# Altium PCB Driver_3.PcbDoc
Units mil, origin at the board's own origin, x right, y up, seen from the top; angles counter-clockwise.
Board outline 3937.01 x 3937.01 mil, 2 copper layers (Top Layer, Bottom Layer); 124 components, 77 nets, 373 pads, 361 vias.
Unrouted connection lines stored in the file: 72.
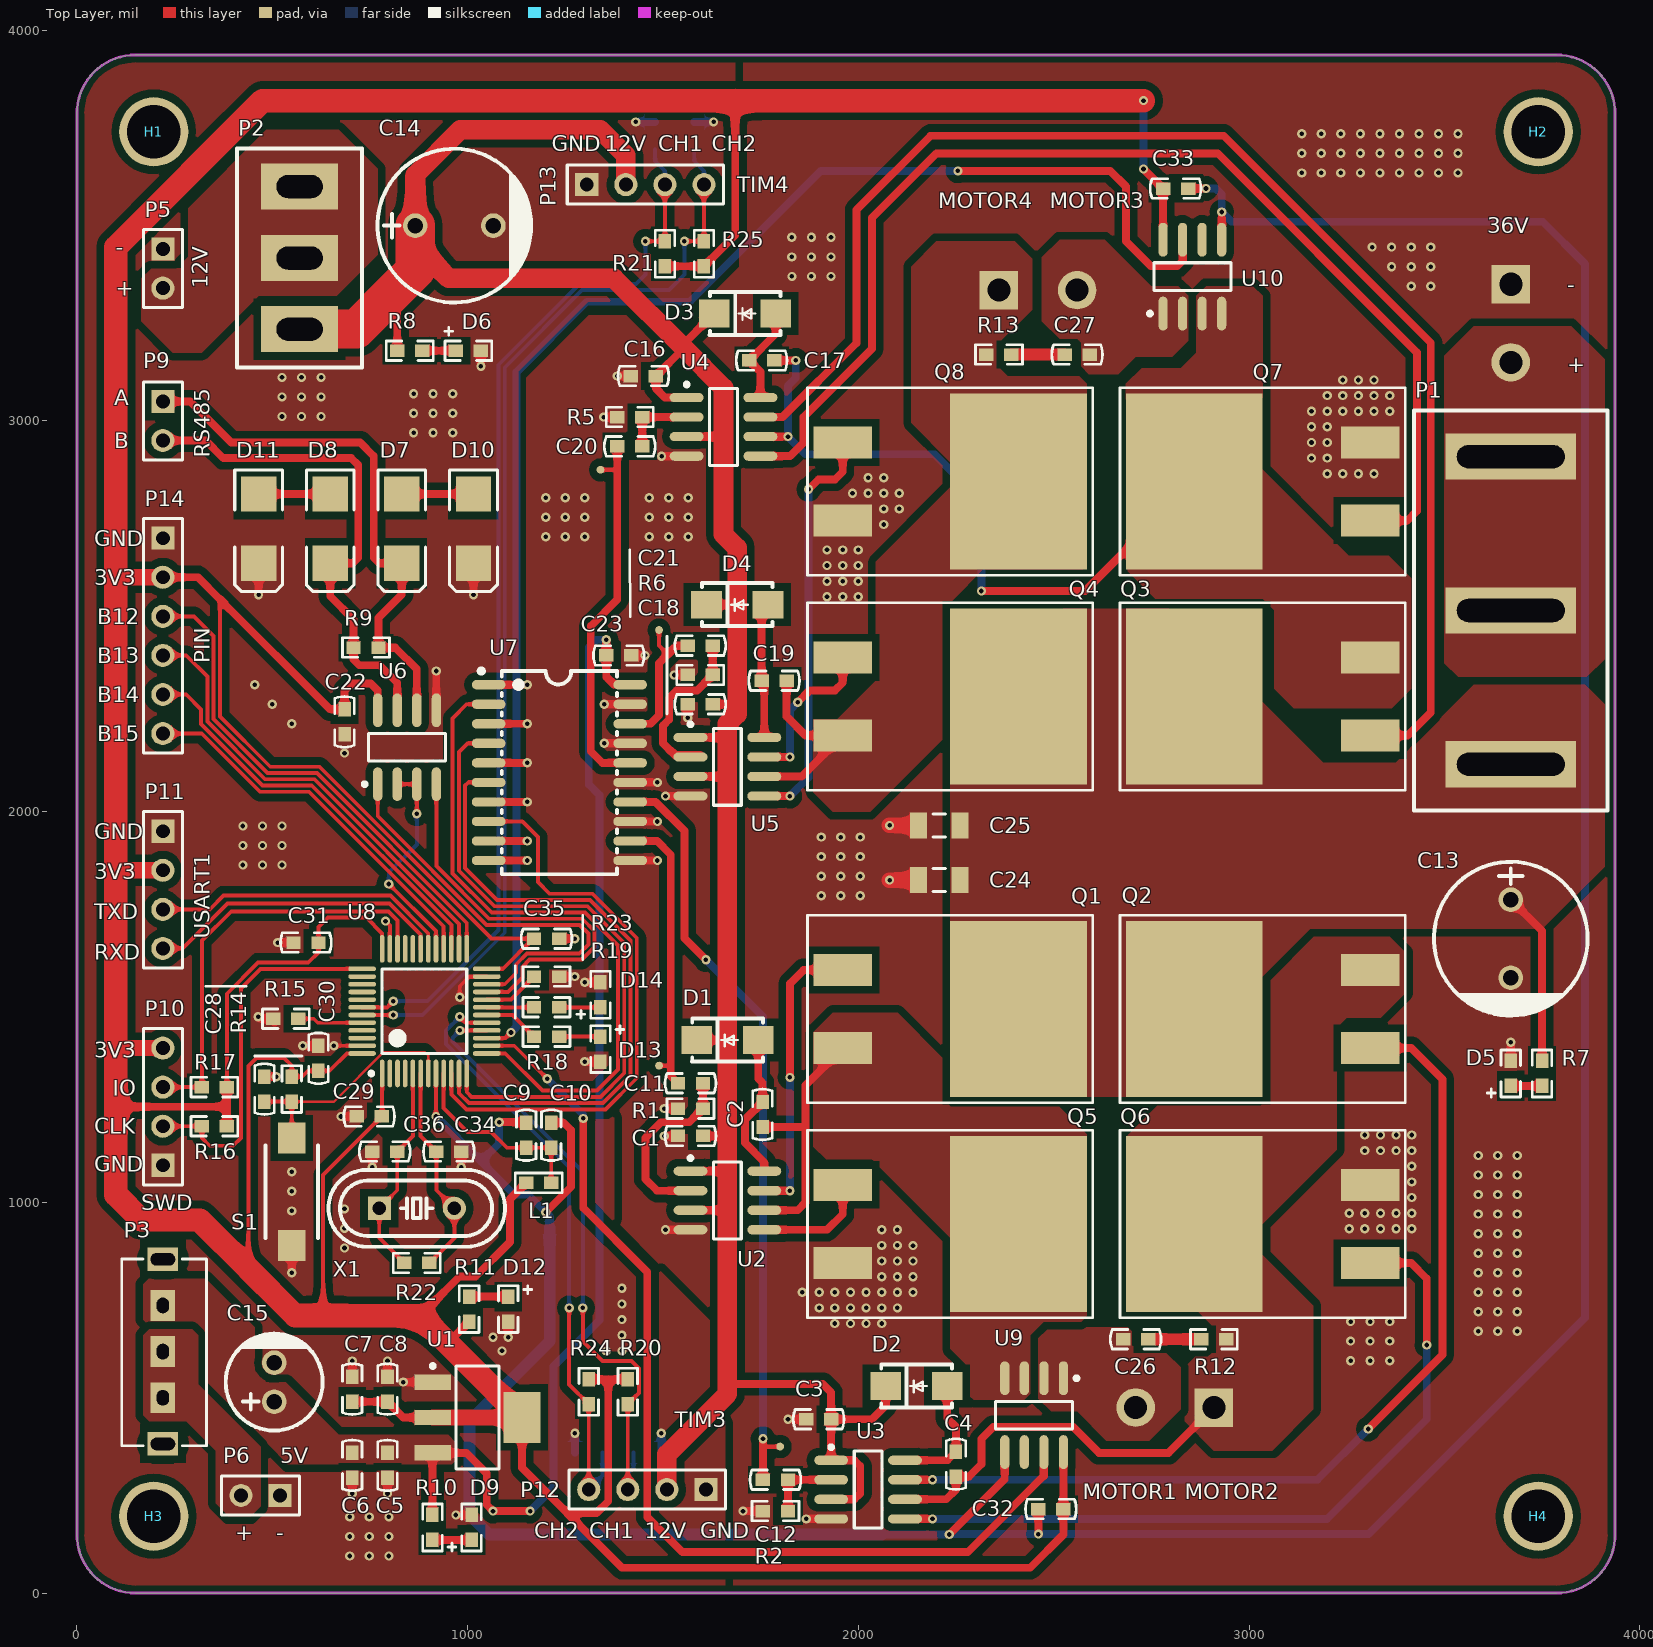
[diagram p0: Top Layer view]
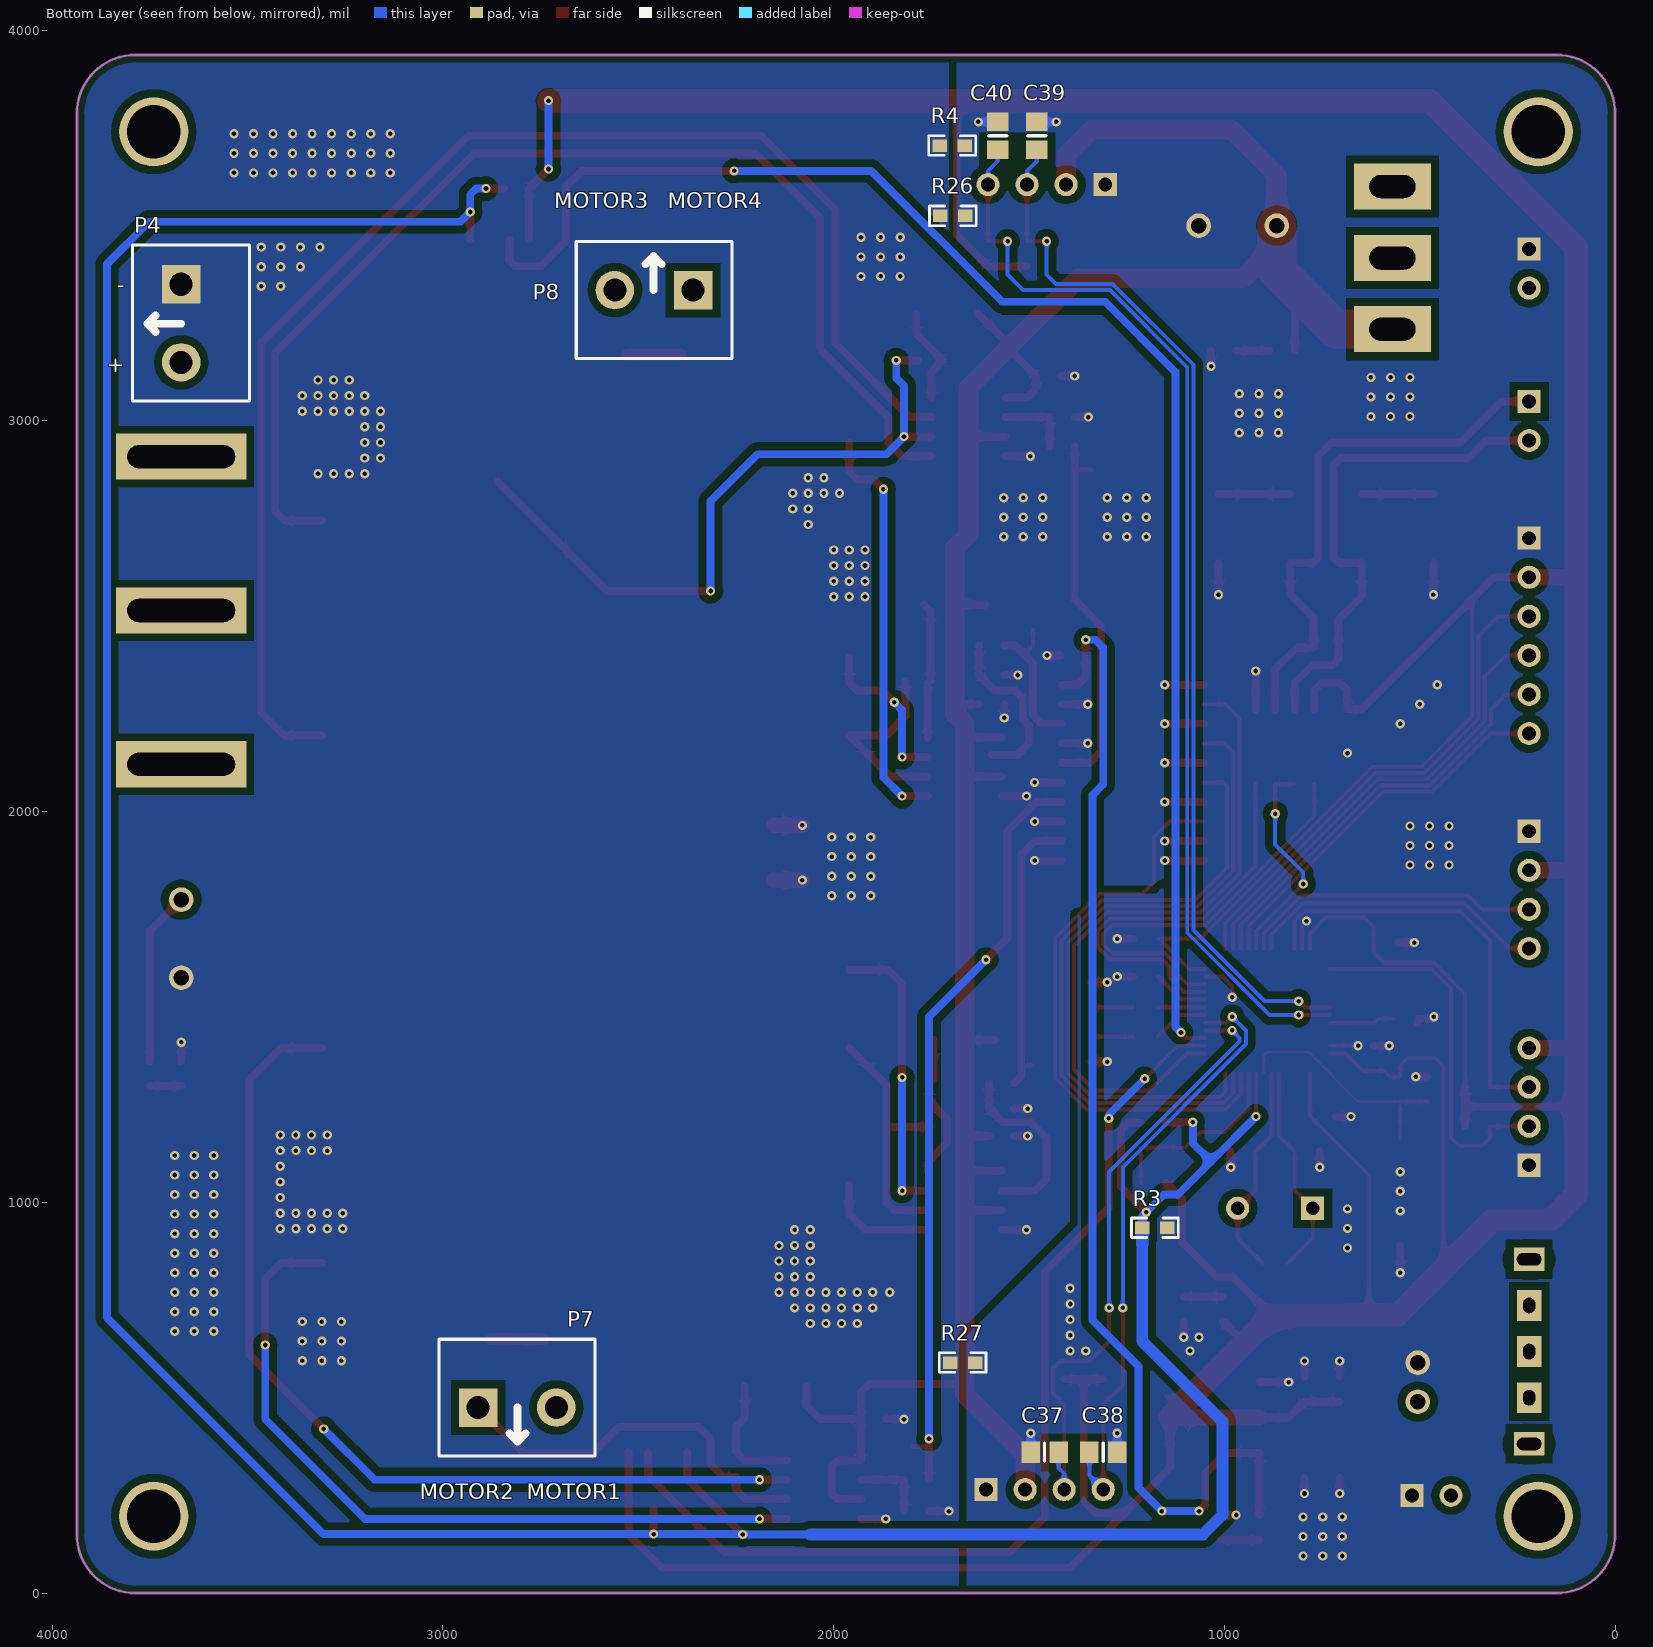
[diagram p1: Bottom Layer view, seen from below]

## Layer stack, top to bottom
Top Solder: solder mask 0.4, Solder Resist, Dk 3.5
Top Layer: signal copper 1.4
Dielectric 1: dielectric 12.6, FR-4, Dk 4.8
Bottom Layer: signal copper 1.4
Bottom Solder: solder mask 0.4, Solder Resist, Dk 3.5

## Board outline
0,150 0,3787.01 cw(c150,3787.01) 150,3937.01 3787.01,3937.01 cw(c3787.01,3787.01) 3937.01,3787.01 3937.01,150 cw(c3787.01,150) 3787.01,0 150,0 cw(c150,150)

## Design rules (kind name [scope] priority, off if disabled: settings)
Clearance Clearance_2 [InPolygon vs OnLayer('Keep-Out Layer')] p1: gap=15.75 ignorepadtopadclearanceinfootprint=FALSE
Clearance Clearance_1 [All vs InPolygon] p2: gap=20 ignorepadtopadclearanceinfootprint=FALSE
Clearance [All] p3: gap=6 ignorepadtopadclearanceinfootprint=FALSE
HoleSize [All] p1: absolutevalues=TRUE maxlimit=500 minlimit=1 maxpercent=80.000 minpercent=20.000
PlaneConnect PlaneConnect_1 [InNet('DGND')] p1: planeconnectstyle=Relief reliefexpansion=20 reliefentries=4 reliefconductorwidth=10 reliefairgap=10
PlaneConnect [All] p2: planeconnectstyle=Direct reliefexpansion=20 reliefentries=4 reliefconductorwidth=10 reliefairgap=10
PolygonConnect [All] p1: connectstyle=Direct reliefconductorwidth=10 reliefentries=4 polygonreliefangle="90 Angle" airgapwidth=10
RoutingVias [All] p1: holewidth=28 width=50 viastyle="Through Hole" minholewidth=28 minwidth=50 maxholewidth=28 maxwidth=50
SilkToSilkClearance [All] p1: silktosilkclearance=6
SilkToSolderMaskClearance [IsPad] p1: minsilkscreentomaskgap=3 clearancetoexposedcopper=TRUE
SolderMaskExpansion [All] p1: expansion=4
Width [All] p1: maxlimit=400 minlimit=6 preferedwidth=10 minimp=50.000000 maximp=50.000000 favimp=50.000000
26 further rules are at their usual default settings.

## Classes and differential pairs
component class Driver: C1 C2 C3 C4 C5 C6 C7 C8 C9 C10 C11 C12 C13 C14 C15 C16 C17 C18 C19 C20 C21 C22 C23 C24 C25 C26 C27 C28 C29 C30 C31 C32 C33 C34 C35 C36 C37 C38 C39 C40 D1 D2 D3 D4 D5 D6 D7 D8 D9 D10 D11 D12 D13 D14 H1 H2 H3 H4 L1 P1 P2 P3 P4 P5 P6 P7 P8 P9 P10 P11 P13 P14 Q1 Q2 Q3 Q4 Q5 Q6 Q7 Q8 R1 R2 R3 R4 R5 R6 R7 R8 R9 R10 R11 R12 R13 R14 R16 R17 R18 R19 R20 R21 R22 R23 R24 R25 S1 U1 U2 U3 U4 U5 U6 U7 U8 U9 U10 X1

## Components (designator, comment, footprint, x,y, rotation, side; value= is the part's Value field where it differs from the comment)
C1 "0.1μF" 0603C 1570.51,1170 r0 top
C2 "1μF" 0603C 1755,1225 r270 top
C3 "0.1μF" 0603C 1898.51,445 r0 top
C4 "1μF" 0603C 2250,330 r270 top
C5 "10μF" 0603C 795,326.94 r90 top
C6 "0.1μF" 0603C 705,326.94 r90 top
C7 "10μF" 0603C 705,522 r270 top
C8 "0.1μF" 0603C 795,522 r270 top
C9 "0.1μF" 0603C 1150,1172 r270 top
C10 "1μF" 0603C 1214,1172 r270 top
C11 "0.1μF" 0603C 1570.51,1305 r0 top
C12 "0.1μF" 0603C 1788,290 r0 top
C13 "220μF 50V" CAP-TH_BD10.0-P5.00-D1.0-FD 3670,1675 r270 top
C14 "220μF 50V" CAP-TH_BD10.0-P5.00-D1.0-FD 966,3500 r0 top locked
C15 "220μF 16V" CAP-TH_BD6.3-P2.50-D1.0-FD 505,540 r90 top locked
C16 "0.1μF" 0603C 1450,3115 r0 top
C17 "1μF" 0603C 1752.49,3155 r0 top
C18 "0.1μF" 0603C 1595.51,2275 r0 top
C19 "1μF" 0603C 1784.49,2335 r0 top
C20 "0.1μF" 0603C 1415,2935 r0 top
C21 "0.1μF" 0603C 1595.51,2425 r0 top
C22 "0.1μF" 0603C 685,2230 r270 top
C23 "100nF" 0603C 1387,2400 r0 top
C24 "1μF" C1206 2206.85,1825 r0 top
C25 "1μF" C1206 2206.85,1965 r0 top
C26 "0.1μF" 0603C 2710,650 r180 top
C27 "0.1μF" 0603C 2560,3170 r0 top
C28 "0.1μF" 0603C 480,1289.87 r270 top
C29 "0.1μF" 0603C 748,1220 r0 top
C30 "0.1μF" 0603C 618.36,1368.87 r270 top
C31 "0.1μF" 0603C 586.36,1665 r0 top
C32 "0.1μF" 0603C 2493,215 r0 top
C33 "0.1μF" 0603C 2812,3595 r180 top
C34 "20pF" 0603C 952,1130 r0 top
C35 "0.1μF" 0603C 1202,1675 r180 top
C36 "20pF" 0603C 788,1130 r180 top
C37 "1nF" 6-0805_N 1460,360 r180 bottom
C38 "1nF" 6-0805_N 1310,360 r0 bottom
C39 "1nF" 6-0805_N 1480,3730 r270 bottom
C40 "1nF" 6-0805_N 1580,3730 r270 bottom
D1 "D-SS12" SMA_L4.4-W2.6-LS5.0-RD 1665,1415.55 r0 top
D2 "D-SS12" SMA_L4.4-W2.6-LS5.0-RD 2148.74,530 r0 top
D3 "D-SS12" SMA_L4.4-W2.6-LS5.0-RD 1710,3275 r0 top
D4 "D-SS12" SMA_L4.4-W2.6-LS5.0-RD 1690,2530 r0 top
D5 "LED_0603" 0603D 3670,1330 r90 top
D6 "LED_0603" 0603D 1002,3180 r0 top
D7 "P6KE11A" SMB 831.67,2724.5 r270 top
D8 "P6KE11A" SMB 648.33,2724.5 r270 top
D9 "LED_0603" 0603D 1010,168 r90 top
D10 "P6KE6.8A" SMB 1015,2724.5 r270 top
D11 "P6KE6.8A" SMB 465,2724.5 r270 top
D12 "LED_0603" 0603D 1103.92,727 r270 top
D13 "LED_0603" 0603D 1340,1392.29 r270 top
D14 "LED_0603" 0603D 1340,1531.29 r90 top
H1 "安装孔" 安装孔#1 260,3740.16 r0 top
H2 "安装孔" 安装孔#2 3730,3705 r0 top
H3 "安装孔" 安装孔#3 92.58,92.58 r0 top
H4 "安装孔" 安装孔#4 3740.16,92.58 r0 top
L1 "Inductor" 0603L 1182,1050 r0 top
P1 "SWITCH36" 船型开关 3670,2515 r180 top
P2 "SWITCH12" 钮子开关 570,3417 r180 top
P3 "SWITCH5" SWITCH_SS-12F44 220,500 r90 top
P4 "PWR36" KF301 3670,3250 r270 bottom
P5 "PWR12" HDR1X2 220,3440 r270 top locked
P6 "PWR5" HDR1X2 520,250 r180 top locked
P7 "MOTOR" KF301 2810,475 r180 bottom
P8 "MOTOR" KF301 2460,3335 r0 bottom
P9 "RS485" HDR1X2 220,3050 r270 top
P10 "Header 4" HDR1X4 220,1095 r90 top locked
P11 "UART" HDR1X4 220,1950 r270 top locked
P12 "CODER" HDR1X4 1610,265 r180 top locked
P13 "CODER" HDR1X4 1305,3605 r0 top locked
P14 "GPIO" HDR1X6 220,2700 r270 top locked
Q1 "IRF3205" IRF3205_D2PAK 2585,1495 r270 top
Q2 "IRF3205" IRF3205_D2PAK 2685,1495 r90 top
Q3 "IRF3205" IRF3205_D2PAK 2685,2295 r90 top
Q4 "IRF3205" IRF3205_D2PAK 2585,2295 r270 top
Q5 "IRF3205" IRF3205_D2PAK 2585,945 r270 top
Q6 "IRF3205" IRF3205_D2PAK 2685,945 r90 top
Q7 "IRF3205" IRF3205_D2PAK 2685,2845 r90 top
Q8 "IRF3205" IRF3205_D2PAK 2585,2845 r270 top
R1 "10K" 0603R 1570.51,1240 r0 top
R2 "10K" 0603R 1788,210 r0 top
R3 "0Ω" 0603R 1178,935 r180 bottom value=10K
R4 "0Ω" 0603R 1696.5,3705 r180 bottom value=10K
R5 "10K" 0603R 1415,3010 r0 top
R6 "10K" 0603R 1595.51,2350 r0 top
R7 "10K" 0603R 3750,1330 r90 top
R8 "10K" 0603R 852,3180 r180 top
R9 "120" 0603R 740,2420 r180 top value=10K
R10 "10K" 0603R 910,168 r90 top
R11 "10K" 0603R 1003.92,727 r270 top
R12 "100R" 0603R 2910,650 r0 top value=10K
R13 "100R" 0603R 2360,3170 r180 top value=10K
R14 "10K" 0603R 550,1289.87 r270 top
R15 "10K" 0603R 535,1470 r0 top
R16 "10K" 0603R 352,1195 r180 top
R17 "10K" 0603R 352,1295 r180 top
R18 "10K" 0603R 1202,1424.29 r180 top
R19 "10K" 0603R 1202,1499.29 r180 top
R20 "10K" 0603R 1410,515.49 r90 top
R21 "10K" 0603R 1505,3428 r270 top
R22 "1M" 0603R 870,845 r180 top value=10K
R23 "10K" 0603R 1202,1578.03 r0 top
R24 "10K" 0603R 1310,515.49 r90 top
R25 "10K" 0603R 1605,3428 r270 top
R26 "Comment" 0603R 1695,3525 r180 bottom
R27 "Comment" 0603R 1670,590 r0 bottom
S1 "SW_PB" SMD_6MM*3MM 550,1027.2 r270 top
U1 "AS1117-3.3" SOT223_N 1025,449.49 r0 top
U2 "IR2104S" SO8_N 1665,1005 r0 top
U3 "IR2104S" SO8_N 2025,265 r0 top
U4 "IR2104S" SO8_N 1655,2985 r0 top
U5 "IR2104S" SO8_N 1665,2115 r0 top
U6 "MAX3485" SO8_N 845,2165 r90 top
U7 "74HC244" SOIC-20_L13.3-W7.5-P1.27-LS7.8-BL 1235,2100 r270 top
U8 "stm32f103c8t6" STM-LQFP48_N 889.53,1489.45 r90 top
U9 "CC6904SO" SO8_N 2450,455.51 r270 top
U10 "CC6904SO" SO8_N 2855,3369.49 r90 top
X1 "8MHz" HC-49US_L11.5-W4.5-P4.88 870,985 r0 top
? "Comment" TEST-POINT#1 1490,2465 r0 top
? "Comment" TEST-POINT#2 1340,2875 r0 top
? "Comment" TEST-POINT#3 1800,375 r0 top
? "Comment" TEST-POINT#4 1490,1350 r0 top

## Footprints (in the part's own frame and the unit in brackets; to place one, negate y for a bottom-side part, rotate by r counter-clockwise, add the part's x,y. Pads: shape width x height; smd on the part's side, far side on the other; paste and mask are expansions set on the pad)
6-0805_N [mm] "Chip Resistor, Body 2.0x1.2mm, IPC Medium Density"
  rect 1.2x1.4 smd: 1(-0.9,0) 2(0.9,0)
  silkscreen extent 0,-0.6 0,0.6, body extent -1.07,-0.7 1.07,0.7, height 0.7
0603C [mil]
  rect 37x32 smd: 1(-32,0) 2(32,0)
  silkscreen extent -65,-25 65,25, body extent -31,-16 32,16, height 12
0603D [mil]
  rect 37x32 smd: 1(-32,0) 2(32,0)
  silkscreen extent -60,-25 60,60, body extent -31,-16 32,16, height 12
0603L [mil]
  rect 37x32 smd: 1(-32,0) 2(32,0)
  silkscreen extent -60,-25 60,25, body extent -31,-16 32,16, height 12
0603R [mil]
  rect 37x32 smd: 1(-32,0) 2(32,0)
  silkscreen extent -60,-25 60,25, body extent -31,-16 32,16, height 12
C1206 [mm] "Chip Capacitor, Body 3.2x1.6mm, IPC High Density"
  rect 1.1x1.7 smd: 1(-1.35,0) 2(1.35,0)
  silkscreen extent -0.4,-0.75 0.4,0.75, body extent -1.7,-0.9 1.7,0.9, height 1.3
CAP-TH_BD6.3-P2.50-D1.0-FD [mm]
  round 1.6 hole 1: 1(-1.27,0) 2(1.27,0)
  silkscreen extent -3.15,-3.15 3.17,3.15
CAP-TH_BD10.0-P5.00-D1.0-FD [mm]
  round 1.6 hole 1: 1(-2.54,0) 2(2.54,0)
  silkscreen extent -5,-4.99 5.08,5
HC-49US_L11.5-W4.5-P4.88 [mm]
  rect 1.5x1.5 hole 0.9: 1(-2.438,0)
  round 1.5 hole 0.9: 2(2.438,0)
  silkscreen extent -5.74,-2.5 5.74,2.5
HDR1X2 [mm] "Connector; Header; 2 Position"
  rect 1.5x1.5 hole 0.9: 1(0,0)
  round 1.5 hole 0.9: 2(2.54,0)
  silkscreen extent -1.27,-1.27 3.81,1.27
HDR1X4 [mm] "Connector; Header; 4 Position"
  rect 1.5x1.5 hole 0.9: 1(0,0)
  round 1.5 hole 0.9: 2(2.54,0) 3(5.08,0) 4(7.62,0)
  silkscreen extent -1.27,-1.27 8.89,1.27
HDR1X6 [mm] "Connector; Header; 6 Position"
  rect 1.5x1.5 hole 0.9: 1(0,0)
  round 1.5 hole 0.9: 2(2.54,0) 3(5.08,0) 4(7.62,0) 5(10.16,0) 6(12.7,0)
  silkscreen extent -1.27,-1.27 13.97,1.27
IRF3205_D2PAK [mil]
  rect 82x150 smd: 1(-100,-625) 3(100,-625)
  rect 450x350 smd: 2(0,-175)
  silkscreen extent -240,-715 240,15
KF301 [mm]
  rect 2.5x2.5 hole 1.5: 1(-2.54,0)
  round 2.5 hole 1.5: 2(2.54,0)
  silkscreen extent -5.08,-3.16 5.05,4.44, body extent -4.97,-3.05 5.03,4.35, height 10.18
SMA_L4.4-W2.6-LS5.0-RD [mm]
  rect 2x1.8 smd: 1(-2,0) 2(2,0)
  silkscreen extent -2.3,-1.4 2.3,1.4
SMB [mm] "DO-214-AA/SMB; 2 C-Bend Leads; Body 5.3 x 3.6 mm, inc. leads (LxW)"
  rect 2.3x2.3 smd: 1(-2.25,0) 2(2.25,0)
  silkscreen extent -3.8,-1.55 4.1,1.55
SMD_6MM*3MM [mm]
  rect 2x1.8 smd: 1(-3.5,0) 2(3.5,0)
  silkscreen extent -3,-1.7 3,1.7
SO8_N [mm] "SOIC, 8-Leads, Body 4.9x3.9mm, Pitch 1.27mm, IPC Medium Density"
  oval 2.2x0.6 smd: 1(-2.4,1.905) 2(-2.4,0.635) 3(-2.4,-0.635) 4(-2.4,-1.905) 5(2.4,-1.905) 6(2.4,-0.635) 7(2.4,0.635) 8(2.4,1.905)
  silkscreen extent -2.52,-2.5 0.9,2.88, body extent -2,-2.5 2,2.5, height 1.75
SOIC-20_L13.3-W7.5-P1.27-LS7.8-BL [mm]
  oval 0.6x2.198 smd: 1(-5.715,-4.6) 2(-4.445,-4.6) 3(-3.175,-4.6) 4(-1.905,-4.6) 5(-0.635,-4.6) 6(0.635,-4.6) 7(1.905,-4.6) 8(3.175,-4.6) 9(4.445,-4.6) 10(5.715,-4.6) 11(5.715,4.6) 12(4.445,4.6) 13(3.175,4.6) 14(1.905,4.6) 15(0.635,4.6) 16(-0.635,4.6) 17(-1.905,4.6) 18(-3.175,4.6) 19(-4.445,4.6) 20(-5.715,4.6)
  silkscreen extent -6.75,-5.23 6.6,3.75
SOT223_N [mm] "SOT223, 4-Leads, Body 6.5x3.5mm, Pitch 2.3mm, Lead Span 7mm, IPC Medium Density"
  rect 2.4x1 smd: 1(-2.9,2.3) 2(-2.9,0) 3(-2.9,-2.3)
  rect 2.4x3.3 smd: 4(2.9,0)
  silkscreen extent -3.02,-3.35 1.4,3.47, body extent -1.85,-3.35 1.85,3.35, height 1.7
STM-LQFP48_N [mm] "QFP, 48-Leads, Body 7x7mm, Pitch 0.5mm, IPC Medium Density"
  oval 1.8x0.3 smd: 1(-4.05,2.75) 2(-4.05,2.25) 3(-4.05,1.75) 4(-4.05,1.25) 5(-4.05,0.75) 6(-4.05,0.25) 7(-4.05,-0.25) 8(-4.05,-0.75) 9(-4.05,-1.25) 10(-4.05,-1.75) 11(-4.05,-2.25) 12(-4.05,-2.75) 25(4.05,-2.75) 26(4.05,-2.25) 27(4.05,-1.75) 28(4.05,-1.25) 29(4.05,-0.75) 30(4.05,-0.25) 31(4.05,0.25) 32(4.05,0.75) 33(4.05,1.25) 34(4.05,1.75) 35(4.05,2.25) 36(4.05,2.75)
  oval 0.3x1.8 smd: 13(-2.75,-4.05) 14(-2.25,-4.05) 15(-1.75,-4.05) 16(-1.25,-4.05) 17(-0.75,-4.05) 18(-0.25,-4.05) 19(0.25,-4.05) 20(0.75,-4.05) 21(1.25,-4.05) 22(1.75,-4.05) 23(2.25,-4.05) 24(2.75,-4.05) 37(2.75,4.05) 38(2.25,4.05) 39(1.75,4.05) 40(1.25,4.05) 41(0.75,4.05) 42(0.25,4.05) 43(-0.25,4.05) 44(-0.75,4.05) 45(-1.25,4.05) 46(-1.75,4.05) 47(-2.25,4.05) 48(-2.75,4.05)
  silkscreen extent -4.17,-2.75 2.75,3.57, body extent -3.5,-3.5 3.5,3.5, height 1.6
SWITCH_SS-12F44 [mm]
  rect 2x1.6 hole 0.8 slot 1 at 0 deg: 1(0,0) 2(3,0) 3(6,0)
  rect 1.524x2 hole 1.6 slot 0.8 at 0 deg: 4(-3,0) 5(9,0)
  silkscreen extent -3.12,-2.83 9.02,2.67
TEST-POINT#1 [mil]
  round 20 smd: T4(0,0)
TEST-POINT#2 [mil]
  round 20 smd: T3(0,0)
TEST-POINT#3 [mil]
  round 20 smd: T2(0,0)
TEST-POINT#4 [mil]
  round 20 smd: T1(0,0)
安装孔#1 [mm]
  round 4.5 hole 3.5: 1(-1.604,0)
安装孔#2 [mm]
  round 4.5 hole 3.5: 1(0.258,0.893)
安装孔#3 [mm]
  round 4.5 hole 3.5: 1(2.648,2.648)
安装孔#4 [mm]
  round 4.5 hole 3.5: 1(0,2.648)
船型开关 [mm]
  rect 8.5x3 hole 1.5 slot 7 at 0 deg: 1(0,-10) 2(0,0) 3(0,10)
  silkscreen extent -6.3,-13 6.3,13
钮子开关 [mm]
  rect 5x3 hole 1.5 slot 3 at 0 deg: 1(0,-4.648) 2(0,0) 3(0,4.623)
  silkscreen extent -4.06,-7.11 4.06,7.11

## Part data
C1 C2 C3 C4 C5 C6 C7 C8 C9 C10 C11 C12 C16 C17 C18 C19 C20 C21 C22 C23 C24 C25 C26 C27 C28 C29 C30 C31 C32 C33 C34 C35 C36 C37 C38 C39 C40: library part Cap, "Capacitor", LatestRevisionDate=17-Jul-2002, LatestRevisionNote="Re-released for DXP Platform.", PackageDescription="Radial Cap, Thru-Hole; 2 Leads; 0.3 in Pin Spacing", PackageReference=RAD-0.3, Published=8-Jun-2000, Publisher="Altium Limited"
C13 C14 C15: library part Cap_A, "Capacitor"
D7 D8 D10 D11: library part P6KE68A, BOM_Manufacturer=RUILON, BOM_Manufacturer Part=P6KE68A, BOM_Supplier=LCSC, BOM_Supplier Part=C10195, spicePre=D, spiceSymbolName=P6KE68A
P1 P2 P3: library part "Header 3", "Header, 3-Pin", LatestRevisionDate=17-Jul-2002, LatestRevisionNote="Re-released for DXP Platform.", Publisher="Altium Limited"
P4 P5 P6 P7 P8 P9: library part "Header 2", "Header, 2-Pin", LatestRevisionDate=17-Jul-2002, LatestRevisionNote="Re-released for DXP Platform.", Publisher="Altium Limited"
P10: "Header, 4-Pin", LatestRevisionDate=17-Jul-2002, LatestRevisionNote="Re-released for DXP Platform.", Publisher="Altium Limited"
P11 P12 P13: library part "Header 4", "Header, 4-Pin", LatestRevisionDate=17-Jul-2002, LatestRevisionNote="Re-released for DXP Platform.", Publisher="Altium Limited"
P14: library part "Header 6", "Header, 6-Pin", LatestRevisionDate=17-Jul-2002, LatestRevisionNote="Re-released for DXP Platform.", Publisher="Altium Limited"
R1 R2 R3 R4 R5 R6 R7 R8 R9 R10 R11 R12 R13 R14 R15 R16 R17 R18 R19 R20 R21 R22 R23 R24 R25: library part Res1, "Resistor", LatestRevisionDate=17-Jul-2002, LatestRevisionNote="Re-released for DXP Platform.", PackageDescription="Axial Device, Thru-Hole; 2 Leads; 0.3 in Pin Spacing", PackageReference=AXIAL-0.3, Published=8-Jun-2000, Publisher="Altium Limited"
S1: "SWITCH"
U9 U10: library part CC6902SO
X1: "Crystal", BOM_Manufacturer="ZheJiang East Crystal Elec", BOM_Manufacturer Part=B08000J065, BOM_Supplier=LCSC, BOM_Supplier Part=C258976, Contributor=LCSC, nameAlias=Frequency, spicePre=X, spiceSymbolName=B08000J065
Q1 Q2 Q3 Q4 Q5 Q6 Q7 Q8: Code_JEDEC=TO-220-AB, DatasheetDocument=PD-9.814, LatestRevisionDate=17-Jul-2002, LatestRevisionNote="Re-released for DXP Platform.", Note="Pin 2 is electrically connected to pin 4.", PackageReference=TO-220AB, Published=8-Jun-2000, Publisher="Altium Limited"

## Via types
v1: diameter 23.62, hole 11.81, Top Layer to Bottom Layer, tented both sides, 361 vias

## Nets (pads, with @x,y where several pads share a name; then routed paths per layer and width w, separated by ;. In a path a pad name is that pad's centre, name@x,y a point inside that pad or via, vN(x,y) a via of type N, cw(c..) or ccw(c..) an arc to the next point about the centre after c; other vN are vias at no path point)
485DIR: U6.2 U6.3 U8.29 | length 551.4
  Top Layer w10: v1(798.21,1815) 919.06,1694.15 U8.29 ; U6.2 U6.3 v1(870,1995)
  Bottom Layer w10: v1(798.21,1815) 798.21,1844.15 870,1915.94 v1(870,1995)
ADC12_IN4: U8.14 U9.7 | length 2611.5
  Top Layer w10: U8.14 1119.44,1400.87 v1(1204.05,1316.26)
  Top Layer w20: v1(1296,1215) 1296,986 1460,822 1460,195 1550,105 2280,105 2475,300 U9.7
  Bottom Layer w20: v1(1204.05,1316.26) 1296,1224.3 v1(1296,1215)
ADC12_IN5: U8.15 U10.7 | length 3924.9
  Top Layer w10: U8.15 1096.5,1420.55 v1(1110.94,1435)
  Top Layer w20: v1(2255,3640) 2645,3640 2685,3600 2685,3460 2749,3396 2816,3396 2830,3410 U10.7
  Bottom Layer w20: v1(1110.94,1435) 1125,1449.06 1125,3125 1305,3305 1569,3305 1904,3640 v1(2255,3640)
AGND: C9.1 C10.1 C32.1 C33.1 R3.1 U8.8 U9.5 U10.5 | length 9171.6
  Top Layer w10: v1(919.06,1220) U8.8
  Top Layer w20: v1(1080.76,1205.39) 1148.61,1205.39 C9.1 ; v1(1200,975) 1265,1040 1265,1185 1246,1204 C10.1 ; v1(2233,150) 2375,292 U9.5 ; v1(2461,151) C32.1 ; C33.1 v1(2890,3595) ; U10.5 v1(2930,3535)
  Bottom Layer w20: v1(919.06,1220) 1034.06,1105 ; v1(1080.76,1205.39) 1080.76,1151.71 1034.06,1105 ; R3.1 1210,965 v1(1200,975) 1155,1020 1119.06,1020 1034.06,1105 ; 2060,150 v1(2233,150) 2234,151 v1(2461,151) 3306,151 3860,705 3860,3402 3752,3510 2955,3510 v1(2930,3535) 2930,3580 2915,3595 v1(2890,3595)
  Bottom Layer w30: R3.1 1210,645 1005,440 1005,200 1055,150 2060,150
DGND: C5.1 C6.1 C7.1 C8.1 C14.2 C15.2 C22.2 C28.1 C29.1 C30.1 C31.1 C34.2 C35.1 C36.2 C37.1 C38.1 C39.1 C40.1 D6.2 D9.2 D10.2 D11.2 D12.2 D13.2 D14.2 P5.1 P6.1 P10.1 P11.1 P12.1 P13.1 P14.1 R3.2 R4.2 R15.1 R23.2 R26.2 R27.1 S1.2 U1.1 U6.5 U8.23 U8.35 U8.47 | length 1585.7
  Top Layer w10: v1(657.87,1400.87) U8.47 ; v1(790,1720) 800.94,1709.06 U8.35 ; v1(980,1525) 980,1552.82 980.24,1553.06 980,1553.29 1004.74,1578.03 U8.23
  Top Layer w20: v1(463.72,1475) 468.72,1470 R15.1@495.92,1470 ; v1(465,2555) D11.2 ; C28.1 v1(510,1321.87) ; R15.1 R15.1@495.92,1470 ; R15.1@506,1459.92 R15.1@495.92,1470 ; v1(514.36,1665) C31.1 ; v1(550,820) S1.2 ; v1(578.36,1400.87) C30.1 ; v1(676,1220) C29.1 ; v1(705,254.94) C6.1 ; C7.1 v1(705,594) ; v1(756,1090) C36.2 ; v1(795,254.94) C5.1 ; C8.1 v1(795,594) ; v1(835.55,540.04) U1.1 ; U6.5 v1(920,2360) ; v1(970,200) D9.2 ; v1(984,1090) C34.2 ; v1(1015,2555) D10.2 ; v1(1034,3140) D6.2 ; v1(1103.92,655) D12.2 ; R23.2 v1(1274,1578.03) ; C35.1 v1(1274,1675) ; v1(1300,1360.29) D13.2 ; v1(1300,1563.29) D14.2
  Bottom Layer w20: C38.1 v1(1274.57,409.43) ; v1(1430.43,3765.43) C39.1 ; C37.1 v1(1495.43,408.92) ; C40.1 v1(1629.57,3765.43)
  other v1: 698.51,95 748.51,95 798.51,95 698.51,145 748.51,145 798.51,145 698.51,195 748.51,195 798.51,195 1088.04,620 1355,620 1395,620 1065,655 1395,660 1395,700 1395,740 1395,780 685,883.38 685,933.38 550,978.26 685,983.38 550,1028.26 550,1078.26 425,1863.5 475,1863.5 525,1863.5 425,1913.5 475,1913.5 525,1913.5 425,1963.5 475,1963.5 525,1963.5 685,2150 550,2225 500,2275 455,2325 861.71,2970 911.71,2970 961.71,2970 525,3011.6 575,3011.6 625,3011.6 861.71,3020 911.71,3020 961.71,3020 525,3061.6 575,3061.6 625,3061.6 861.71,3070 911.71,3070 961.71,3070 525,3111.6 575,3111.6 625,3111.6
IN1+: C26.2 P7.2 U9.1 U9.2
IN1-: C2.2 Q1.3 Q5.2 U2.6 U9.3 U9.4 | length 656.1
  Top Layer w20: C2.2 1853,1193 1865,1193 1865,1000 1845,980 U2.6 ; 1865,1195 1865,1300 Q1.3
IN2+: C27.2 P8.2 U10.1 U10.2
IN2-: C17.2 Q3.3 Q7.2 U4.6 U10.3 U10.4 | length 1783.6
  Top Layer w20: U4.6 v1(1820,2960) ; C17.2 v1(1840,3155) ; v1(2315,2565) 2580,2565 Q7.2
  Bottom Layer w20: v1(1840,3155) 1840,3110 1820,3090 v1(1820,2960) 1865,2915 2195,2915 2315,2795 v1(2315,2565)
LED1: R18.2 U8.18 | length 143.9
  Top Layer w10: U8.18 1114.68,1479.61 R18.2
LED2: R19.2 U8.19 | length 121
  Top Layer w10: U8.19 R19.2
MOS_1H: Q1.1 U2.7 | length 745
  Top Layer w20: U2.7 v1(1825,1030) ; v1(1825,1320) 1825,1560 1860,1595 Q1.1
  Bottom Layer w20: v1(1825,1030) v1(1825,1320)
MOS_1L: Q5.1 U2.5 | length 292.1
  Top Layer w20: U2.5 1920,930 1960,970 Q5.1
MOS_2H: Q2.1 U3.7 | length 2431.2
  Top Layer w20: U3.7 v1(2190,290) ; v1(3305,420) 3495,610 3495,1315 3415,1395 Q2.1
  Bottom Layer w20: v1(2190,290) 3175,290 v1(3305,420)
MOS_2L: Q6.1 U3.5 | length 1962.7
  Top Layer w20: U3.5 v1(2190,190) ; Q6.1 3415,845 3455,805 v1(3455,635)
  Bottom Layer w20: v1(2190,190) 3200,190 3455,445 v1(3455,635)
MOS_3H: Q3.1 U4.7 | length 3558.5
  Top Layer w20: U4.7 1806,3010 1995,3199 1995,3540 2185,3730 2935,3730 3465,3200 3465,2254 3406,2195 Q3.1
MOS_3L: Q7.1 U4.5 | length 2982.4
  Top Layer w20: U4.5 1825,2910 1860,2945 1860,3010 2035,3185 2035,3520 2200,3685 2920,3685 3430,3175 3430,2770 3405,2745 Q7.1
MOS_4H: Q4.1 U5.7 | length 414.5
  Top Layer w20: U5.7 v1(1825,2140) ; v1(1845,2280) 1875,2310 1940,2310 1960,2330 Q4.1
  Bottom Layer w20: v1(1825,2140) 1825,2260 v1(1845,2280)
MOS_4L: Q8.1 U5.5 | length 1051.1
  Top Layer w20: U5.5 v1(1825,2040) ; v1(1872.81,2825) 1897.81,2850 1940,2850 1960,2870 Q8.1
  Bottom Layer w20: v1(1825,2040) 1872.81,2087.81 v1(1872.81,2825)
MOTOR2: C4.2 P7.1 Q2.3 Q6.2 R12.2 U3.6 | length 999.7
  Top Layer w20: U3.6 2225,240 2250,265 C4.2 2283,298 2315,330 2315,394.49 2345.51,425 2550,425 2616.06,358.94 2793.94,358.94 P7.1
MOTOR4: C19.2 P8.1 Q4.3 Q8.2 R13.2 U5.6 | length 499.1
  Top Layer w20: U5.6 1855,2090 Q4.3 1865,2195 1816.49,2243.51 C19.2
NetC2_1: C2.1 D1.2 U2.8 | length 379.4
  Top Layer w20: D1.2 1743.74,1317.26 1755,1306 C2.1 1710,1212 1710,1152.49 1759.49,1103 U2.8
NetC4_1: C4.1 D2.2 U3.8 | length 317
  Top Layer w20: U3.8 2228,340 C4.1 2250,425 2227.48,447.52 D2.2
NetC11_2: C11.2 R1.2 U2.2 | length 476.5
  Top Layer w20: U2.2 1485,1030 1455,1060 1455,1165 1495,1205 1567.51,1205 R1.2 C11.2
NetC12_2: C12.2 R2.2 U3.2 | length 190.5
  Top Layer w20: R2.2 C12.2 U3.2
NetC17_1: C17.1 D3.2 U4.8 | length 255.3
  Top Layer w20: U4.8 1749.49,3126 C17.1 1788.74,3223.25 D3.2
NetC19_1: C19.1 D4.2 U5.8 | length 349.6
  Top Layer w20: U5.8 1759.49,2328 C19.1 1752.49,2513.75 D4.2
NetC20_2: C20.2 R5.2 U4.2 | length 188.5
  Top Layer w20: C20.2 R5.2 U4.2
NetC21_2: C21.2 R6.2 U5.2 | length 441.5
  Top Layer w20: U5.2@1595.51,2145 1530,2145 1500,2175 1500,2220.23 1516,2236.23 1516,2291 1535,2310 1587.51,2310 R6.2 C21.2
NetC26_1: C26.1 R12.1 | length 136
  Top Layer w30: C26.1 R12.1
NetC27_1: C27.1 R13.1 | length 136
  Top Layer w30: R13.1 C27.1
NetD5_1: D5.1 R7.1 | length 80
  Top Layer w20: D5.1 R7.1
NetD6_1: D6.1 R8.1 | length 86
  Top Layer w20: R8.1 D6.1
NetD7_1: D7.1 D10.1 | length 183.3
  Top Layer w20: D7.1 D10.1
NetD8_1: D8.1 D11.1 | length 183.3
  Top Layer w20: D11.1 D8.1
NetD9_1: D9.1 R10.1 | length 100
  Top Layer w20: R10.1 D9.1
NetD12_1: D12.1 R11.1 | length 100
  Top Layer w20: R11.1 D12.1
NetD13_1: D13.1 R18.1 | length 106
  Top Layer w10: R18.1 D13.1
NetD14_1: D14.1 R19.1 | length 106
  Top Layer w10: R19.1 D14.1
NetP1_1: P1.1 P1.2 P4.2
NetP2_1: P2.1 P2.2 P5.2
NetP3_1: P3.1 P3.2 P6.2
NetR15_2: R15.2 U8.44 | length 167.3
  Top Layer w10: R15.2 606.3,1470 616.38,1459.92 U8.44
NetR23_1: R23.1 U8.20 | length 145.5
  Top Layer w10: U8.20 1110.94,1518.98 R23.1
NRST: C28.2 R14.2 S1.1 U8.7 | length 614.4
  Top Layer w6: R14.2 657.87,1257.87 785,1385 890,1385 899.37,1375.63 U8.7
  Top Layer w10: C28.2 R14.2 S1.1
"OSC IN": C36.1 R22.2 U8.5 X1.1 | length 547.1
  Top Layer w10: R22.2 774,909 X1.1 820,1031 C36.1 860,1170 U8.5
"OSC OUT": C34.1 R22.1 U8.6 X1.2 | length 547.3
  Top Layer w10: U8.6 879.68,1170.32 C34.1 920,1031 X1.2 966,909 R22.1
PB12: P14.3 U8.25 | length 1293.9
  Top Layer w10: P14.3 300,2500 350,2450 350,2237.37 488.37,2099 614.35,2099 997.8,1715.55 U8.25
PB13: P14.4 U8.26 | length 1174.1
  Top Layer w10: P14.4 280,2400 334,2346 334,2230.75 481.75,2083 607.72,2083 978.11,1712.61 U8.26
PB14: P14.5 U8.27 | length 1065.9
  Top Layer w10: P14.5 280,2300 318,2262 318,2224.12 475.12,2067 601.09,2067 958.43,1709.67 U8.27
PB15: P14.6 U8.28 | length 980.9
  Top Layer w10: P14.6 319.49,2200 468.49,2051 594.46,2051 938.74,1706.72 U8.28
PGND: C1.1 C3.1 C13.2 C16.1 C18.1 C23.2 C24.1 C25.1 D5.2 P4.1 Q5.3 Q6.3 Q7.3 Q8.3 R1.1 R2.1 R4.1 R5.1 R6.1 R26.1 R27.2 U2.4 U3.4 U4.4 U5.4 U7.1 U7.3 U7.5 U7.7 U7.9 U7.10 U7.11 U7.13 U7.15 U7.17 U7.19 | length 1729.2
  Top Layer w20: U7.10 v1(1152.93,1875) ; U7.9 v1(1152.93,1925) ; U7.7 v1(1152.93,2025) ; U7.5 v1(1152.93,2125) ; U7.3 v1(1152.93,2225) ; U7.1 v1(1152.93,2325) ; v1(1348,3010) R5.1 ; v1(1350,2175) U7.17 ; v1(1350,2275) U7.19 ; v1(1383,3115) C16.1 ; U7.11 v1(1485.73,1875) ; U7.13 v1(1485.73,1975) ; U7.15 v1(1485.73,2075) ; C23.2 v1(1454,2400) ; v1(1496.51,2910) U4.4 ; v1(1503.51,1170) C1.1 ; v1(1503.51,1240) R1.1 ; v1(1506.51,930) U2.4 ; v1(1506.51,2040) U5.4 ; v1(1528.51,2350) R6.1 ; v1(1563.51,2240) C18.1 ; v1(1705,210) R2.1 ; v1(1820,445) C3.1 ; v1(1866.51,190) U3.4 ; D5.2 v1(3670,1410)
  Top Layer w40: v1(2080,1825) C24.1 ; v1(2080,1965) C25.1
  other v1: 3260,595 3310,595 3360,595 3260,645 3310,645 3360,645 3586.57,670 3636.57,670 3686.57,670 1940,690 1980,690 2020,690 2060,690 3260,695 3310,695 3360,695 3586.57,720 3636.57,720 3686.57,720 1900,730 1940,730 1980,730 2020,730 2060,730 2100,730 1856.25,770 1900,770 1940,770 1980,770 2020,770 2060,770 2100,770 2140,770 3586.57,770 3636.57,770 3686.57,770 2060,810 2100,810 2140,810 3586.57,820 3636.57,820 3686.57,820 2060,850 2100,850 2140,850 3586.57,870 3636.57,870 3686.57,870 2140,889.41 2060,890 2100,890 3586.57,920 3636.57,920 3686.57,920 2060,930 2100,930 3256.44,932.5 3296.44,932.5 3336.44,932.5 3376.44,932.5 3416.44,932.5 3586.57,970 3636.57,970 3686.57,970 3256.44,972.5 3296.44,972.5 3336.44,972.5 3376.44,972.5 3416.44,972.5 3416.44,1012.5 3586.57,1020 3636.57,1020 3686.57,1020 3416.44,1052.5 3586.57,1070 3636.57,1070 3686.57,1070 3416.44,1092.5 3586.57,1120 3636.57,1120 3686.57,1120 3296.44,1132.5 3336.44,1132.5 3376.44,1132.5 3416.44,1132.5 3296.44,1172.5 3336.44,1172.5 3376.44,1172.5 3416.44,1172.5 1905,1785 1955,1785 2005,1785 1905,1835 1955,1835 2005,1835 1905,1885 1955,1885 2005,1885 1905,1935 1955,1935 2005,1935 1920,2550 1960,2550 2000,2550 1920,2590 1960,2590 2000,2590 1920,2630 1960,2630 2000,2630 1920,2670 1960,2670 2000,2670 1200,2703.7 1250,2703.7 1300,2703.7 1465,2703.7 1515,2703.7 1565,2703.7 2065,2735 1200,2753.7 1250,2753.7 1300,2753.7 1465,2753.7 1515,2753.7 1565,2753.7 2065,2775 2105,2775 1200,2803.7 1250,2803.7 1300,2803.7 1465,2803.7 1515,2803.7 1565,2803.7 1985,2815 2025,2815 2065,2815 2105,2815 2025,2855 2065,2855 3200,2865 3240,2865 3280,2865 3320,2865 3160,2905 3200,2905 3160,2945 3200,2945 3160,2985 3200,2985 3160,3025 3200,3025 3240,3025 3280,3025 3320,3025 3360,3025 3200,3065 3240,3065 3280,3065 3320,3065 3360,3065 3240,3105 3280,3105 3320,3105 3415,3345 3465,3345 1830,3370 1880,3370 1930,3370 3365,3395 3415,3395 3465,3395 1829.93,3420 1880,3420 1930,3420 3315,3445 3365,3445 3415,3445 3465,3445 1829.93,3470 1880,3470 1930,3470 3135,3635 3185,3635 3235,3635 3285,3635 3335,3635 3385,3635 3435,3635 3485,3635 3535,3635 3135,3685 3185,3685 3235,3685 3285,3685 3335,3685 3385,3685 3435,3685 3485,3685 3535,3685 3135,3735 3185,3735 3235,3735 3285,3735 3335,3735 3385,3735 3435,3735 3485,3735 3535,3735
PWM1: ?.T1 C11.1 U7.12 | length 741.1
  Top Layer w10: ?.T1 1520,1350
  Top Layer w20: U7.12 1485,1925 1520,1890 1520,1350 1520,1323.51 C11.1
PWM2: ?.T2 C12.1 U7.14 | length 1957.8
  Top Layer w10: 1756,375 ?.T2
  Top Layer w20: U7.14 1481,2025 1555,1951 1555,1676.26 v1(1610,1621.26) ; C12.1 1756,375 v1(1756,395)
  Bottom Layer w20: v1(1610,1621.26) 1756,1475.26 v1(1756,395)
PWM3: ?.T3 C20.1 U7.16 | length 964.7
  Top Layer w10: ?.T3 1383,2875
  Top Layer w20: C20.1 1383,2875 1383,2543 1315,2475 1315,2155 1345,2125 U7.16
PWM4: ?.T4 C21.1 U7.18 | length 380
  Top Layer w10: ?.T4 1490,2425 1512.5,2402.5
  Top Layer w20: U7.18 1468,2225 1490,2247 1490,2380 1512.5,2402.5 1535,2425 C21.1
PWM_1: U7.8 U8.10 | length 1506.3
  Top Layer w10: U8.10 958.43,1276.32 996.75,1238 1353.25,1238 1433,1317.75 1433,1677 1320,1790 1210,1790 1180,1820 1180,1935 1140,1975 U7.8
PWM_2: U7.6 U8.11 | length 1650.3
  Top Layer w10: U8.11 978.11,1279.26 1003.37,1254 1346.63,1254 1417,1324.37 1417,1670.37 1313.37,1774 1075.11,1774 993.71,1855.4 993.71,2066.97 1001.75,2075 U7.6
PWM_3: U7.4 U8.12 | length 1703.4
  Top Layer w10: U8.12 997.8,1282.2 1010,1270 1340,1270 1401,1331 1401,1663.75 1306.75,1758 1068.48,1758 977.71,1848.77 977.71,2152.71 1000,2175 U7.4
PWM_4: U7.2 U8.13 | length 1718.8
  Top Layer w10: U8.13 1096.33,1381.18 1191.51,1286 1331,1286 1385,1340 1385,1657.12 1300.12,1742 1061.86,1742 961.71,1842.15 961.71,2239 997.71,2275 U7.2
RS485A: D7.2 P9.1 R9.1 U6.6 | length 1402.4
  Top Layer w20: P9.1 290,3050 395,2945 725,2945 760,2910 760,2650 774.08,2635.92 D7.2 831.67,2555.72 772,2496.06 R9.1 815,2420 870,2365 U6.6
RS485B: D8.2 P9.2 R9.2 U6.7 | length 1318.8
  Top Layer w20: P9.2 330,2950 375,2905 702.37,2905 720,2887.37 720,2650 705.92,2635.92 D8.2 648.33,2551.67 708,2492 R9.2 708,2390 723,2375 775,2375 820,2330 U6.7
SWCLK: P10.2 R16.2 U8.37 | length 959.9
  Top Layer w10: P10.2 R16.2 320,1165 340,1145 400,1145 420,1165 420,1547.37 470.34,1597.72 U8.37
SWDIO: P10.3 R17.2 U8.34 | length 1089.1
  Top Layer w10: P10.3 R17.2 320,1670 395,1745 797.26,1745 820.63,1721.63 U8.34
TIM3_CH1: C37.2 P12.3 R20.1 U8.16 | length 1606.9
  Top Layer w10: v1(980.24,1440.24) U8.16 ; v1(1295,730) 1295,644 1345,594 1420,594 1439,575 1439,512.49 R20.1 P12.3
  Bottom Layer w10: v1(980.24,1440.24) 961,1421 961,1411.63 1295,1077.63 v1(1295,730) ; P12.3 1410,305.43 1424.57,320 C37.2
TIM3_CH2: C38.2 P12.4 R24.1 U8.17 | length 1560.6
  Top Layer w10: v1(980,1475) 995.08,1459.92 U8.17 ; v1(1260,730) 1260,533.49 R24.1 P12.4
  Bottom Layer w10: v1(980,1475) 945,1440 945,1405 1260,1090 v1(1260,730) ; P12.4 1345.43,300.43 C38.2
TIM4_CH1: C39.2 P13.3 R21.1 U8.42 | length 2729.5
  Top Layer w10: U8.42 794.29,1499.29 v1(810,1515) ; v1(1455,3460) R21.1 P13.3
  Bottom Layer w10: v1(810,1515) 897.18,1515 1079,1696.82 1079,3144 1286,3351 1431,3351 1455,3375 v1(1455,3460) ; C39.2 1480,3665 1505,3640 P13.3
TIM4_CH2: C40.2 P13.4 R25.1 U8.43 | length 2837.7
  Top Layer w10: U8.43 v1(809.61,1479.61) ; v1(1555,3460) R25.1 P13.4
  Bottom Layer w10: v1(809.61,1479.61) 884.42,1479.61 1095,1690.19 1095,3137.37 1292.63,3335 1515,3335 1555,3375 v1(1555,3460) ; C40.2 1580,3665 1605,3640 P13.4
USART1_RX: P11.4 U8.31 | length 776.7
  Top Layer w10: P11.4 270,1650 385,1765 800,1765 879.68,1685.32 U8.31
USART1_TX: P11.3 U8.30 | length 773.3
  Top Layer w10: P11.3 340,1750 375,1785 802.63,1785 899.37,1688.26 U8.30
USART3_RX: U6.1 U8.22 | length 1087.8
  Top Layer w10: U6.1 770,1988.6 1048.6,1710 1286.86,1710 1309,1687.86 1309,1660.53 1285.73,1637.26 1152.26,1637.26 1124.5,1609.5 1124.5,1587.85 1095,1558.35 U8.22
USART3_TX: U6.4 U8.21 | length 1063.7
  Top Layer w10: U6.4 920,1861.23 1055.23,1726 1293.49,1726 1325,1694.49 1325,1653.9 1292.36,1621.26 1158.89,1621.26 1140.5,1602.87 1140.5,1575.5 1103.66,1538.66 U8.21
VCC3.3: C7.2 C8.2 C22.1 C29.2 C30.2 C31.2 C32.2 C33.2 C35.2 L1.1 P10.4 P11.2 P14.2 R11.2 R14.1 R16.1 R17.1 R20.2 R21.2 R24.2 R25.2 U1.2 U1.4 U6.8 U8.1 U8.24 U8.36 U8.48 U9.8 U10.8 | length 16233.4
  Top Layer w10: 366,2544 366,2244 495,2115 620.97,2115 1060.97,1675 C35.2@1167.37,1675 ; R17.1 384,1534 463.72,1613.72 592.07,1613.72 618.36,1640 C31.2 618.36,1705 642.36,1729 741,1729 781.26,1688.74 U8.36 ; 439,830 439,1349 460,1370 529.96,1370 550,1349.96 R14.1 576.87,1321.87 591.87,1336.87 C30.2 646.87,1336.87 691.18,1381.18 U8.48 ; 630,710 630,1070 C29.2 781.26,1221.26 U8.1 ; U8.24 1090.09,1597.72 C35.2@1167.37,1675 ; C35.2 C35.2@1167.37,1675
  Top Layer w20: 100,1245 384,1245 ; P14.2 310,2600 366,2544 648,2262 C22.1 685,2310 703,2328 752,2328 770,2310 U6.8 ; R16.1 384,1245 ; R17.1 384,1245 ; C7.2 C8.2 835.51,449.49 U1.2 ; 878.66,710 978.66,810 1020,810 1108.5,898.5 1108.5,1008.5 L1.1 ; 948.66,640 948.92,640 R11.2 ; U1.4 1139.17,320.83 1255,205 ; R24.2 1360,547.49 ; R20.2 1360,547.49 ; R21.2 R25.2 1685,3476 1685,3820 ; U9.8 C32.2 2525,150 2440,65 1395,65 1255,205 ; v1(2730,3645) C33.2 U10.8 ; 1255,205 1330,205 1360,235 1360,547.49
  Top Layer w40: 100,1395 P10.4 ; 100,1850 P11.2 ; 100,2600 P14.2 ; U1.2 U1.4
  Top Layer w60: U1.4 948.66,640 878.66,710 630,710 559,710 439,830 314,955 165,955 100,1020 100,1245 100,1395 100,1850 100,2600 100,3445 475,3820 1685,3820 v1(2730,3820)
  Bottom Layer w20: v1(2730,3645) v1(2730,3820)
VCC5: C5.2 C6.2 C15.1 C23.1 P3.3 R10.2 U1.3 U7.20 | length 3124.7
  Top Layer w20: R10.2 910,358.11 U1.3 996.32,358.94 1048.98,306.28 1048.98,226.02 v1(1065,210) v1(1160,210) ; v1(1355,2440) C23.1 1355,2345 1375,2325 U7.20
  Bottom Layer w20: v1(1065,210) v1(1160,210) 1220,270 1220,580.72 1337.5,698.21 1337.5,2042.5 1310,2070 1310,2420 1330,2440 v1(1355,2440)
VCC12: C1.2 C3.2 C14.1 C16.2 C18.2 D1.1 D2.1 D3.1 D4.1 P2.3 P12.2 P13.2 R8.2 U2.1 U2.3 U3.1 U3.3 U4.1 U4.3 U5.1 U5.3 | length 7285.3
  Top Layer w20: 815,3335 820,3330 R8.2 ; U4.3 1655,2960 ; U4.1 1505,3060 1482,3083 C16.2 1552,3185 1555,3185 1555,3198.74 D3.1 ; U2.3 1665,980 ; U2.1 1665,1080 ; U5.3 1665,2090 ; U5.1 1665,2190 ; D1.1 1664.45,1415.55 1665,1415 ; C1.2 1665,1170 ; D4.1 1690,2530 ; C18.2 1665,2275 1690,2250 ; 1670,535 1909,535 1930.51,513.49 C3.2 ; U3.3 1990,240 2005,255 2005,325 1990,340 U3.1 C3.2 ; D2.1 2070,480 2035,445 C3.2
  Top Layer w50: 866,3451 952,3365 1375,3365 1555,3185 1655,3085 1655,2960 1655,2710 1690,2675 1690,2530 1690,2250 1665,2225 1665,2190 1665,2090 1665,1415 1665,1170 1665,1080 1665,980 1665,510 1510,355 P12.2 ; C14.1 866,3630.17 980.83,3745 1340,3745 1405,3680 P13.2
  Top Layer w100: P2.3 715,3235 815,3335 866,3386 866,3451 C14.1
VCC36: C13.1 C24.2 C25.2 P1.3 Q1.2 Q2.2 Q3.2 Q4.2 R7.2 | length 446.1
  Top Layer w20: C13.1 3750,1695 R7.2
VDDA: C9.2 C10.2 L1.2 U8.9 | length 495.9
  Top Layer w10: U8.9 938.74,1241.26 1000,1180 1060.25,1180 1100.25,1140 C9.2 C10.2 L1.2
pads on no net: H1.1 H2.1 H3.1 H4.1 P3.4 P3.5 U8.2 U8.3 U8.4 U8.32 U8.33 U8.38 U8.39 U8.40 U8.41 U8.45 U8.46 U9.6 U10.6

## Polygon pours and split planes (outlines as drawn)
DGND on Top Layer "Top Layer-DGND" (solid, pour order 50): 0,3827.01 110,3937.01 1685,3937.01 1685,3420 1570,3305 1309,3305 1130,3126 1130,1835 1175,1790 1320,1790 1375,1735 1375,943.29 1660,658.29 1660,0 0,0
PGND on Top Layer "Top Layer-PGND" (solid, pour order 54): 1695,3940 1697.99,3940 3825,3940 3940,3825 3940,100 3840,0 1660,0 1660,673 1383,950 1383,1738.2 1310,1811.2 1168.8,1811.2 1150,1830 1150,3110 1310,3270 1570,3270 1695,3395
no net on Top Layer "Top Layer-No Net" (solid, pour order 48): 0,4030
no net on Top Layer "Top Layer-No Net 1" (solid, pour order 44): 0,3995
IN2- on Top Layer "Top Layer-IN2- 1" (solid, pour order 42): 3235,2265 3365,2265 3415,2315 3415,2597.5 3357.5,2655 3255,2655 3025,2885 2760,2885 2690,2815 2690,2615 2760,2545 3035,2545 3065,2515 3065,2314.49 3115,2264.49
MOTOR4 on Top Layer "Top Layer-MOTOR4 1" (solid, pour order 40): 2235,2830 2045,2640 2045,2335 1946.23,2236.23 1885,2236.23 1885,2050 1935,2000 2030,2000 2225,2195 2225,2525 2320,2620 2575,2620 2575,2755 2500,2830
PGND on Top Layer "Top Layer-PGND 1" (solid, pour order 38): 1882.22,889.41 1946.91,889.41 2030,972.5 2130,972.5 2170,932.5 2170,722.5 2125,677.5 1882.5,677.5 1820,740 1820,827.19
PGND on Top Layer "Top Layer-PGND 2" (solid, pour order 36): 3281.14,1193 3432,1193 3460,1165 3460,940 3425,905 3240,905 3180,965 3180,1055 3261.25,1136.25 3261.25,1173.11
PGND on Top Layer "Top Layer-PGND 3" (solid, pour order 34): 3135,2890 3200,2825 3325,2825 3385,2885 3385,3080 3370,3095 3187.5,3095 3135,3042.5
PGND on Top Layer "Top Layer-PGND 4" (solid, pour order 32): 1885,2785 1885,2535.83 1911.43,2505 1990,2505 2020,2535 2020,2680 2040,2700 2069.37,2700 2135,2765.63 2135,2835 2095,2875 2010,2875 1920,2785
MOTOR2 on Top Layer "Top Layer-MOTOR2 1" (solid, pour order 30): 3045,1562.5 3045,1262.5 3030,1247.5 2765,1247.5 2690,1172.5 2690,942.5 3032.5,942.5 3225,1135 3225,1447.5 3250,1472.5 3337.5,1472.5 3400,1535 3400,1640 3357.5,1682.5 3165,1682.5
IN1- on Top Layer "Top Layer-IN1- 1" (solid, pour order 26): 1885,1143 1918,1110 2035,1110 2055,1090 2240,905 2585,905 2585,1174.11 2514.11,1245 2237,1245 2215,1267 2215,1370.55 2100.55,1485 1935,1485 1885,1435
NetP3_1 on Top Layer "Top Layer-NetP3_1" (solid, pour order 24): 0,3970
VCC36 on Top Layer "Top Layer-VCC36" (solid, pour order 22): 2235,1610 2575,1270 2727.28,1270 3157.28,1700 3751,1700 3910,1859 3910,2275 3850,2335 3585,2335 3375,2125 3190,2125 2795,2520 2525,2520 2235,2230
NetP1_1 on Top Layer "Top Layer-NetP1_1" (solid, pour order 20): 3575,3242.5 3825,3242.5 3910,3157.5 3910,2390 3865,2345 3535,2345 3500,2380 3500,3167.5
MOTOR2 on Top Layer "Top Layer-MOTOR2" (solid, pour order 18): 2835,440 2910,365 3060,365 3165,470 3165,735 3035,865 2980,865 2835,865 2835,755 2915,675 2915,625 2895,605 2862.5,605 2835,577.5
MOTOR4 on Top Layer "Top Layer-MOTOR4" (solid, pour order 16): 2490,2895 2585,2990 2585,3095 2565,3115 2382.5,3115 2355,3142.5 2355,3195 2445,3285 2445,3415 2400,3460 2200,3460 2135,3395 2135,2995 2235,2895
IN2+ on Top Layer "Top Layer-IN2+" (solid, pour order 12): 2844,3320 2819,3345 2750,3345 2631.02,3463.98 2515,3463.98 2470,3418.98 2470,3255 2515,3210 2560,3210 2570,3200 2570,3140 2590,3120 2665,3120 2710,3165 2804,3165 2844,3205
IN2- on Top Layer "Top Layer-IN2-" (solid, pour order 10): 2865,3320 2890,3345 3010,3345 3035,3320 3035,3060 3005,3030 2710,3030 2685,3055 2685,3095 2725,3135 2825,3135 2865,3175
IN1+ on Top Layer "Top Layer-IN1+" (solid, pour order 8): 2480,680 2461,661 2461,498 2494,465 2560,465 2635,390 2745,390 2825,470 2825,577.5 2782.5,620 2715,620 2700,635 2700,670 2690,680
IN1- on Top Layer "Top Layer-IN1-" (solid, pour order 6): 2440,510 2425,495 2295,495 2285,505 2285,575 2235,625 2235,745 2285,795 2528,795 2585,738 2585,710 2570,695 2475,695 2440,660
NetP2_1 on Top Layer "Top Layer-NetP2_1" (solid, pour order 4): 190,3390 165,3365 165,3255 245,3175 320,3175 465,3320 665,3320 770,3425 770,3645 670,3745 485,3745 285,3545 285,3420 255,3390
VCC5 on Top Layer "Top Layer-VCC5" (solid, pour order 2): 185,805 170,790 170,700 185,685 300,685 325,660 325,545 540,330 960,330 970,340 970,385 950,405 670,405 534.96,540.04 485,540.04 455,570.04 455,680 330,805
NetP3_1 on Top Layer "Top Layer-NetP3_1 1" (solid, pour order 0): 185,675 170,660 170,455 185,440 280,440 355,365 355,230 388.15,196.85 445,196.85 470,221.85 470,375 310,535 310,660 295,675
PGND on Bottom Layer "Bottom Layer-PGND" (solid, pour order 56): 1695,3940 1697.99,3940 3825,3940 3940,3825 3940,100 3840,0 1660,0 1660,673 1383,950 1383,1738.2 1310,1811.2 1168.8,1811.2 1150,1830 1150,3110 1310,3270 1570,3270 1695,3395
DGND on Bottom Layer "Bottom Layer-DGND" (solid, pour order 52): 0,3835 102.01,3937.01 1685,3937.01 1685,3420 1570,3305 1309,3305 1130,3126 1130,1835 1175,1790 1320,1790 1375,1735 1375,943.29 1660,658.29 1660,0 0,0

## Keep-outs
Keep-Out Layer:
  the board outline again, w7

## Other copper
Top Layer:
  pour cut-out: 3255,2692.03 3255,2671.37 3261.37,2665 3367.01,2665 3429.42,2602.59 3436.15,2602.59 3445,2611.44 3445,2725 3435,2735 3419.69,2735 3399.74,2715.05 3399.74,2699.74 3390,2692.03
  pour cut-out: 3080,2250 3190,2140 3219.61,2140 3225,2145.39 3225,2244 3214,2255 3085,2255
  pour cut-out: 2670.08,2611.92 2742,2540 2732,2530 2603.18,2530 2597.5,2535.68 2597.5,2555 2654.42,2611.92
  pour cut-out: 2609.33,3111.6 2663,3111.6 2675,3099.61 2675,2688.84 2616.16,2630 2600,2630 2595,2635 2595,3099.61
  pour cut-out: 2535,1253.34 2594.67,1193.67 2594.67,698.68 2603.35,690 2665,690 2670,695 2670,1170.38 2745,1245.38 2745,1249.39 2734.39,1260 2544.48,1260
  pour cut-out: 801.7,1282.2 833.9,1282.2 844.06,1272.04 844.06,1178.5 825.23,1159.68 787.26,1159.68 766.8,1180.13 778.89,1192.21 801.7,1192.21
  pour cut-out: 1117.78,1161.98 1117.78,1174.72 1114,1178.5 1090.5,1178.5 1090.5,1169.5 1100,1160
  pour cut-out: 1013.2,1212.51 1065.49,1212.51 1066,1212 1066,1204.93 1064.02,1202.95 1005,1202.95
  pour cut-out: 1239.49,1086 1252.5,1086 1252.5,1099 1250,1101.5 1239.49,1101.5
  pour cut-out: 1111.5,1086 1188.51,1086 1188.51,1101.5 1114,1101.5

## Silkscreen, mask and mechanical layers (free items; w line width, h text height)
Top Overlay:
  lines w7: 330,1553.03 433.76,1553.03 ; 455,1375 576.35,1375 ; 1122,1471.29 1122,1605 ; 1295,1621.26 1295,1735 ; 1415,2670 1416,2499.88 ; 1510.27,2449.35 1510.51,2250
  text "GND" at 1215,3690 h40
  text "12V" at 1351.67,3690 h40
  text "CH1" at 1488.33,3690 h40
  text "CH2" at 1625,3690 h40
  text "TIM4" at 1690,3585 h40
  text "MOTOR4" at 2205,3545 h40
  text "MOTOR3" at 2490,3545 h40
  text "36V" at 3610,3480 h40
  text "-" at 100,3425 h40
  text "12V" at 335,3340 h40 r90
  text "-" at 3815,3330 h40
  text "+" at 100,3320 h40
  text "+" at 3815,3125 h40
  text "A" at 95,3040 h40
  text "B" at 95,2930 h40
  text "RS485" at 340,2906 h40 r90
  text "GND" at 45,2680 h40
  text "3V3" at 45,2580 h40
  text "B12" at 51.66,2480 h40
  text "B13" at 51.66,2380 h40
  text "PIN" at 340,2380 h40 r90
  text "B14" at 51.66,2280 h40
  text "B15" at 51.66,2180 h40
  text "GND" at 45,1930 h40
  text "3V3" at 45,1827.09 h40
  text "TXD" at 45,1724.17 h40
  text "USART1" at 340,1675 h40 r90
  text "RXD" at 45,1621.26 h40
  text "3V3" at 45,1370 h40
  text "IO" at 91.65,1272.75 h40
  text "CLK" at 45,1175.51 h40
  text "GND" at 45,1078.26 h40
  text "SWD" at 165,980 h40
  text "TIM3" at 1530,425 h40
  text "5V" at 520,332 h40
  text "MOTOR1" at 2575,240 h40
  text "MOTOR2" at 2835,240 h40
  text "CH2" at 1170,140 h40
  text "CH1" at 1311.67,140 h40
  text "12V" at 1453.33,140 h40
  text "GND" at 1595,140 h40
  text "+" at 405,135 h40
  text "-" at 510,135 h40
Bottom Overlay:
  text "MOTOR4" at 2425,3545 h40
  text "MOTOR3" at 2715,3545 h40
  text "-" at 3815,3330 h40
  text "+" at 3815,3125 h40
  text "MOTOR1" at 2785,240 h40
  text "MOTOR2" at 3060,240 h40
Mechanical 1:
  the board outline again, w7
Drill Drawing:
  text ".Legend" at 4750,3385 h40